# Altium PCB Zigbee_GW.PcbDoc (part 1 of 2)
Units mm, origin at the board's own origin, x right, y up, seen from the top; angles counter-clockwise.
Board outline 80.85 x 47.5 mm, 2 copper layers (Top Layer, Bottom Layer), stack 1.569 mm thick; 135 components, 110 nets, 481 pads, 279 vias.
Unrouted connection lines stored in the file: 2.
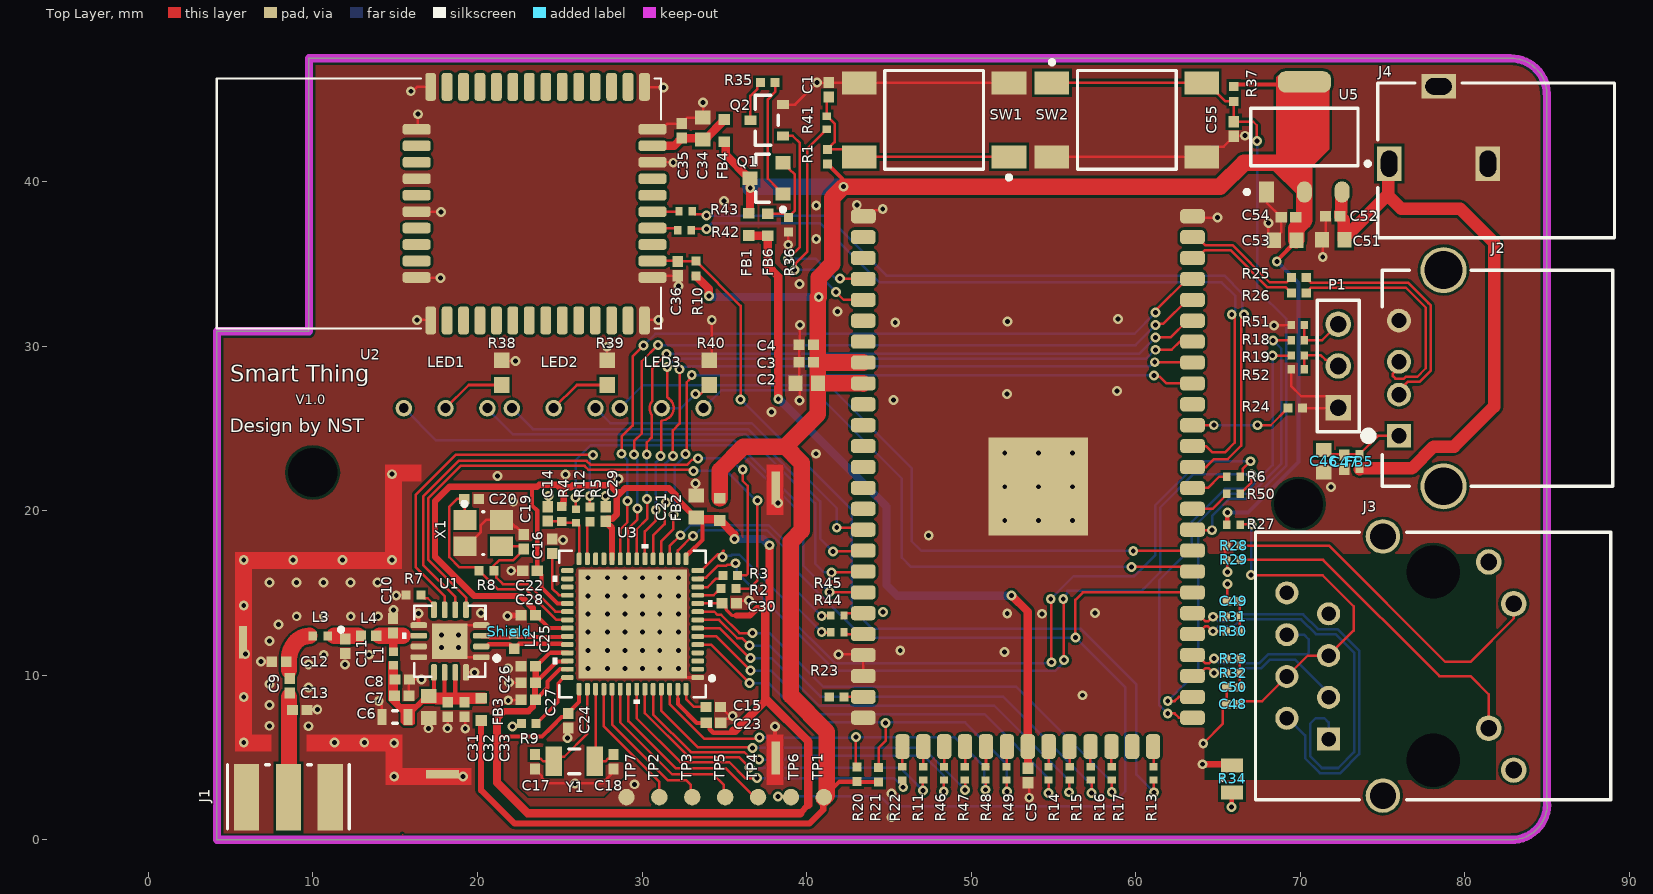
[diagram p0: Top Layer view]
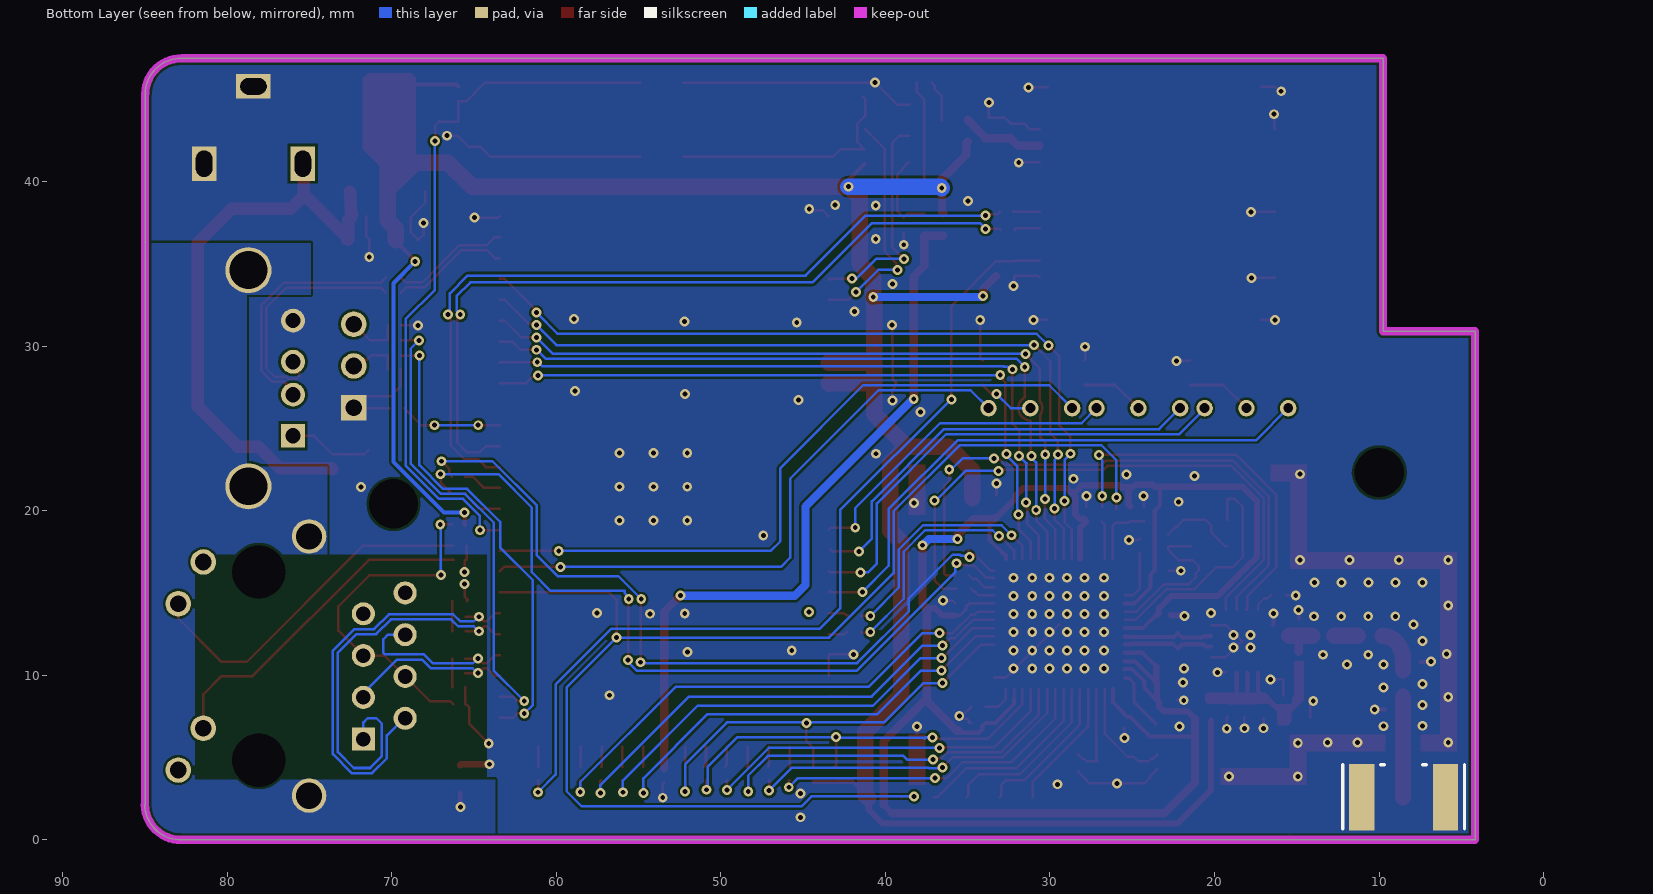
[diagram p1: Bottom Layer view, seen from below]

## Layer stack, top to bottom
Top Solder: solder mask 0.0254, SM-001, Dk 4
Top Layer: signal copper 0.035
Dielectric 1: core 1.4986, Core-043, Dk 4.3
Bottom Layer: signal copper 0.035
Bottom Solder: solder mask 0.0254, SM-001, Dk 4

## Board outline
4.166,0 4.166,30.912 9.754,30.912 9.754,47.498 82.779,47.498 cw(c82.817,45.326) 84.988,45.364 85,45.364 85,2.134 85.014,2.134 cw(c82.842,2.172) 82.804,0

## Design rules (kind name [scope] priority, off if disabled: settings)
Clearance Clearance_INPAD [All] p1: gap=0.152 ignorepadtopadclearanceinfootprint=FALSE
Clearance [All] p2: gap=0.152 ignorepadtopadclearanceinfootprint=FALSE
DiffPairsRouting [All] p1: maxlimit=0.254 minlimit=0.152 mostfreqgap=0.254 toplayer_minwidth=0.152 toplayer_maxwidth=0.381 toplayer_prefwidth=0.381 bottomlayer_minwidth=0.152 bottomlayer_maxwidth=0.381 bottomlayer_prefwidth=0.381 maxuncoupledlength=12.7
MatchedLengths "Schematic Matched Net Lengths_2" [InNetClass('ZIGBEE_RF')] p1: tolerance=0.254 checknetsindiffpair=TRUE checkdiffpairvsdiffpair=FALSE checkxsignals=FALSE checkothers=FALSE
MatchedLengths "Schematic Matched Net Lengths_1" [InNetClass('USB')] p2: tolerance=0.254 checknetsindiffpair=TRUE checkdiffpairvsdiffpair=FALSE checkxsignals=FALSE checkothers=FALSE
MatchedLengths "Schematic Matched Net Lengths" [InNetClass('ETHERNET')] p3: tolerance=0.254 checknetsindiffpair=TRUE checkdiffpairvsdiffpair=FALSE checkxsignals=FALSE checkothers=FALSE
PlaneConnect [All] p1: planeconnectstyle=Direct reliefexpansion=0.508 reliefentries=4 reliefconductorwidth=0.254 reliefairgap=0.254
PolygonConnect [All] p1: connectstyle=Direct reliefconductorwidth=0.254 reliefentries=4 polygonreliefangle="90 Angle" airgapwidth=0.254
RoomDefinition "07. POWER" [InComponentClass('07. POWER')] p1: confinementstyle=ConfineOut formatcopy=TRUE lockcomponents=FALSE outline 87.097,9.22 118.237,9.22 118.237,19.228 87.097,19.228
RoomDefinition "06. ETHERNET" [InComponentClass('06. ETHERNET')] p2: confinementstyle=ConfineOut formatcopy=TRUE lockcomponents=FALSE outline 87.097,20.93 169.316,20.93 169.316,45.593 87.097,45.593
RoomDefinition "04. Z-WAVE" [InComponentClass('04. Z-WAVE')] p3: confinementstyle=ConfineOut formatcopy=TRUE lockcomponents=FALSE outline 149.454,2.159 196.317,2.159 196.317,33.655 149.454,33.655
RoomDefinition "03. ZIGBEE" [InComponentClass('03. ZIGBEE')] p4: confinementstyle=ConfineOut formatcopy=TRUE lockcomponents=FALSE outline 171.933,36.043 206.375,36.043 206.375,57.328 171.933,57.328
RoomDefinition "02. CPU" [InComponentClass('02. CPU')] p5: confinementstyle=ConfineOut formatcopy=TRUE lockcomponents=FALSE outline 103.022,67.132 163.474,67.132 163.474,102.946 103.022,102.946
RoutingVias [All] p1: holewidth=0.3 width=0.6 viastyle="Through Hole" minholewidth=0.3 minwidth=0.6 maxholewidth=0.6 maxwidth=0.9
SolderMaskExpansion [All] p1: expansion=0.102 istentingtop=FALSE
Width [All] p1: maxlimit=1.524 minlimit=0.152 preferedwidth=0.152
28 further rules are at their usual default settings.

## Classes and differential pairs
net class ZIGBEE_RF: RF_N RF_P
net class USB: GND USBL_N USBL_P USBR_N USBR_P
net class ETHERNET: ETH_RX_N ETH_RX_P ETH_TX_N ETH_TX_P
component class "07. POWER": C51 C52 C53 C54 J4 U5
component class "06. ETHERNET": C48 C49 C50 J3 R27 R28 R29 R30 R31 R32 R33 R34
component class "04. Z-WAVE": C34 C35 C36 FB4 R10 U3
component class "03. ZIGBEE": C6 C7 C8 C9 C10 C11 C12 C13 C14 C15 C16 C17 C18 C19 C20 C21 C22 C23 C24 C25 C26 C27 C28 C29 C30 C31 C32 C33 FB2 FB3 J1 L1 L2 L3 L4 R2 R3 R4 R5 R7 R8 R9 R12 Shield TP1 TP2 TP3 TP4 TP5 TP6 TP7 U1 U2 X1 Y1
component class "02. CPU": C1 C2 C3 C4 C5 C46 C47 C55 FB1 FB5 FB6 J2 LED1 LED2 LED3 P1 Q1 Q2 R1 R6 R11 R13 R14 R15 R16 R17 R18 R19 R20 R21 R22 R23 R24 R25 R26 R35 R36 R37 R38 R39 R40 R41 R42 R43 R44 R45 R46 R47 R48 R49 R50 SW1 SW2
differential pair RF: +RF_P -RF_N
differential pair USBR: +USBR_P -USBR_N
differential pair USBL: +USBL_P -USBL_N
differential pair ETH_TX: +ETH_TX_P -ETH_TX_N
differential pair ETH_RX: +ETH_RX_P -ETH_RX_N

## Components (designator, comment, footprint, x,y, rotation, side; value= is the part's Value field where it differs from the comment)
C1 "100nF" CAPC1005X56X25NL10T15 41.351,45.593 r270 top
C2 "2.2uF" CAPC1608X90X35NL10T15 40.005,27.762 r0 top
C3 "100nF" CAPC1005X56X25NL10T15 39.98,29.032 r0 top
C4 "100nF" CAPC1005X56X25NL10T15 39.98,30.099 r0 top
C5 "100nF" CAPC1005X56X25NL10T15 53.458,3.91 r90 top
C6 "1uF" CAPC1608X90X20NL10 14.986,7.468 r0 top
C7 "1nF" CAPC1005X55X25NL05T10 15.392,8.763 r180 top
C8 "12pF" CAPC1005X55X25NL05T10 15.418,9.754 r180 top
C9 "18pF" CAPC1005X55X25NL05T10 8.585,9.373 r270 top
C10 "2.2pF" CAPC1005X55X25NL05T10 14.859,13.005 r270 top
C11 "2.2pF" CAPC1005X55X25NL05T10 11.963,11.76 r90 top
C12 "0.2pF" CAPC1005X55X25NL05T10 7.934,10.82 r0 top
C13 "DNI" CAPC1005X55X25NL05T10 9.195,7.899 r180 top
C14 "100nF" CAPC1005X56X25NL10T15 24.257,19.812 r270 top
C15 "1uF/10V" CAPC1005X55X25NL05T10 34.333,8.077 r180 top
C16 "1uF/10V" CAPC1005X55X25NL05T10 24.536,17.856 r270 top
C17 "9pF" CAPC1005X55X25NL05T10 23.495,4.75 r90 top
C18 "9pF" CAPC1005X55X25NL05T10 28.27,4.75 r90 top
C19 "9pF" CAPC1005X55X25NL05T10 22.809,18.11 r270 top
C20 "9pF" CAPC1005X55X25NL05T10 19.634,20.726 r180 top
C21 "2.2uF" CAPC1608X90X35NL10T15 33.299,20.269 r270 top
C22 "100nF" CAPC1005X56X25NL10T15 23.19,16.358 r0 top
C23 "100nF" CAPC1005X56X25NL10T15 34.343,7.112 r180 top
C24 "100nF" CAPC1005X56X25NL10T15 25.502,7.239 r90 top
C25 "100nF" CAPC1005X56X25NL10T15 23.077,10.541 r0 top
C26 "100nF" CAPC1005X56X25NL10T15 23.077,9.55 r0 top
C27 "100nF" CAPC1005X56X25NL10T15 23.077,8.509 r0 top
C28 "100nF" CAPC1005X56X25NL10T15 23.077,13.665 r0 top
C29 "100nF" CAPC1005X56X25NL10T15 27.788,19.804 r270 top
C30 "100nF" CAPC1005X56X25NL10T15 35.306,14.376 r180 top
C31 "2.2uF" CAPC1608X90X35NL10T15 17.043,8.077 r90 top
C32 "1nF" CAPC1005X55X25NL05T10 18.186,7.925 r90 top
C33 "12pF" CAPC1005X55X25NL05T10 19.202,7.925 r90 top
C34 "2.2uF" CAPC1608X90X35NL10T15 33.68,43.231 r270 top
C35 "1nF" CAPC1005X55X25NL05T10 32.41,43.104 r270 top
C36 "100nF" CAPC1005X56X25NL10T15 32.182,34.722 r90 top
C46 "2.2uF" CAPC1608X90X35NL10T15 71.425,23.012 r90 top
C47 "100nF" CAPC1005X56X25NL10T15 72.669,22.962 r90 top
C48 "22nF" CAPC1005X60X30LL05T10 65.889,8.255 r0 top
C49 "100nF" CAPC1005X60X30LL05T10 65.938,14.503 r0 top
C50 "100nF" CAPC1005X60X30LL05T10 65.913,9.271 r0 top
C51 "2.2uF" CAPC1608X90X35NL10T15 72.009,36.474 r0 top
C52 "100nF" CAPC1005X56X25NL10T15 71.984,37.897 r0 top
C53 "2.2uF" CAPC1608X90X35NL10T15 69.088,36.449 r0 top
C54 "100nF" CAPC1005X56X25NL10T15 69.291,37.846 r0 top
C55 "100nF" CAPC1005X56X25NL10T15 65.964,43.205 r90 top
FB1 "BLM18HE152SN1D" MURA-BLM18-RF-H4-CHIP-2_V 36.5,37.403 r270 top
FB2 "BLM18HE152SN1D" MURA-BLM18-RF-H4-CHIP-2_V 34.722,20.091 r270 top
FB3 "BLM18HE152SN1D" MURA-BLM18-RF-H4-CHIP-2_V 20.218,7.925 r90 top
FB4 "BLM18HE152SN1D" MURA-BLM18-RF-H4-CHIP-2_V 35.001,43.104 r270 top
FB5 "BLM15EG121SN1D" MURA-BLM15-CHIP-2_V 73.609,22.987 r90 top
FB6 "BLM18HE152SN1D" MURA-BLM18-RF-H4-CHIP-2_V 37.643,37.389 r270 top
J1 "CONSMA003.031" CON-SMA-EDGE031 8.509,2.591 r270 top
J2 "292303-1" TE-292303-1_V 77.149,28.058 r90 top locked
J3 "J0011D01BNL" "J0011D01BNL 1PORT 100 BASE-TX" 71.767,6.121 r90 top locked
J4 "PJ-102B" CUI-PJ-102B_V 78.41,41.097 r0 top locked
L1 "LQP15MN4N7B02D" INDC1005X45X25LL10T10 14.884,11.024 r90 top
L2 "DNI" INDC1005X45X25NL10T10 22.225,12.09 r90 top
L3 "2nH" MURA-IND0402_V 10.439,12.395 r0 top
L4 "1nH" INDC1005X45X25NL10T10 13.386,12.395 r180 top
LED1 "LED DUAL 3P" "LED 3P 2.54" 20.599,26.238 r180 top locked
LED2 "LED DUAL 3P" "LED 3P 2.54" 27.165,26.238 r180 top locked
LED3 "LED DUAL 3P" "LED 3P 2.54" 33.731,26.238 r180 top locked
P1 "TSW-103-07-F-S" SMTC-TSW-103-07-X-S 72.314,26.264 r90 top
Q1 "MMBT2222ALT1G" ONSC-SOT-23-3-318-08_V 37.567,40.208 r180 top
Q2 "SI2302CDS-T1-E3" FP-S-03946-MFG 37.574,43.739 r180 top
R1 "10k" RESC1005X40X25NL05T05 41.275,41.522 r270 top
R2 "10k" RESC1005X40X25NL05T05 35.255,15.265 r0 top
R3 "10k" RESC1005X40X25NL05T05 35.357,16.078 r0 top
R4 "10k" RESC1005X40X25NL05T05 25.121,19.812 r90 top
R5 "10k" RESC1005X40X25NL05T05 26.848,19.787 r90 top
R6 "22R" RESC1005X40X25LL05T05 65.948,22.073 r0 top
R7 "3.9k 1%" RESC1005X40X25NL05T05 16.104,14.884 r0 top
R8 "1MHz 1%" RESC1005X40X25NL05T05 20.549,16.358 r180 top locked
R9 "56k 1%" RESC1005X40X25NL05T05 23.114,7.061 r0 top
R10 "10k" RESC1005X40X25NL05T05 33.274,34.722 r270 top
R11 "22R" RESC1005X40X25LL05T05 47.087,4.039 r90 top
R12 "22R" RESC1005X40X25LL05T05 25.984,19.685 r270 top
R13 "22R" RESC1005X40X25LL05T05 61.087,4.039 r270 top
R14 "22R" RESC1005X40X25LL05T05 54.712,4.039 r270 top
R15 "22R" RESC1005X40X25LL05T05 55.99,4.039 r270 top
R16 "22R" RESC1005X40X25LL05T05 57.269,4.039 r270 top
R17 "22R" RESC1005X40X25LL05T05 58.547,4.039 r270 top
R18 "22R" RESC1005X40X25LL05T05 69.85,30.37 r0 top
R19 "22R" RESC1005X40X25LL05T05 69.85,29.447 r0 top
R20 "4k7" RESC1005X40X25NL05T05 43.053,3.988 r270 top
R21 "4k7" RESC1005X40X25NL05T05 44.374,3.962 r270 top
R22 "22R" RESC1005X40X25LL05T05 45.822,4.039 r90 top
R23 "DNI" RESC1005X40X25NL05T05 41.827,8.687 r0 top
R24 "10k" RESC1005X40X25NL05T05 69.698,26.238 r180 top
R25 "22R" RESC1005X40X25NL05T05 69.918,34.188 r180 top
R26 "22R" RESC1005X40X25NL05T05 69.918,33.249 r180 top
R27 "DNI" RESC1005X40X25LL05T05 65.948,19.152 r180 top
R28 "470R" RESC1005X40X25LL05T05 65.948,17.882 r0 top
R29 "470R" RESC1005X40X25LL05T05 65.948,17.018 r0 top
R30 "49.9R 1%" RESC1005X40X25LL05T05 65.913,12.675 r180 top
R31 "49.9R 1%" RESC1005X40X25LL05T05 65.913,13.564 r180 top
R32 "49.9R 1%" RESC1005X40X25LL05T05 65.938,10.135 r180 top
R33 "49.9R 1%" RESC1005X40X25LL05T05 65.938,11.024 r180 top
R34 "0R 0805" RESC2013X50X30LL20T20 65.862,3.708 r270 top
R35 "10k" RESC1005X40X25NL05T05 37.643,46.025 r180 top
R36 "10k" RESC1005X40X25NL05T05 38.887,37.389 r270 top
R37 "10k" RESC1005X40X25NL05T05 65.964,45.339 r90 top
R38 "270R" RESC1609X55X30NL15T15 21.463,28.397 r270 top
R39 "270R" RESC1609X55X30NL15T15 27.889,28.397 r270 top
R40 "270R" RESC1609X55X30NL15T15 34.087,28.397 r270 top
R41 "22R" RESC1005X40X25LL05T05 41.224,43.586 r270 top
R42 "22R" RESC1005X40X25LL05T05 32.582,37.059 r180 top
R43 "22R" RESC1005X40X25LL05T05 32.645,38.202 r180 top
R44 "22R" RESC1005X40X25LL05T05 41.877,12.624 r180 top
R45 "22R" RESC1005X40X25LL05T05 41.877,13.64 r180 top
R46 "22R" RESC1005X40X25LL05T05 48.351,4.039 r90 top
R47 "22R" RESC1005X40X25LL05T05 49.616,4.039 r90 top
R48 "22R" RESC1005X40X25LL05T05 50.881,4.039 r90 top
R49 "22R" RESC1005X40X25LL05T05 52.146,4.039 r90 top
R50 "22R" RESC1005X40X25LL05T05 65.948,21.031 r0 top
R51 "3k" RESC1005X40X25LL05T05 69.85,31.293 r0 top
R52 "3k" RESC1005X40X25LL05T05 69.85,28.6 r0 top
Shield "Shield RF" SHIELD 24.384,11.278 r0 top
SW1 "FSM4JSMATR" TECO-FSM4JSMATR_V 47.752,43.764 r270 top
SW2 "FSM4JSMATR" TECO-FSM4JSMATR_V 59.461,43.764 r90 top
TP1 "Test Point" TP#1 40.359,2.6 r90 top
TP2 "Test Point" TP#2 31.052,2.261 r90 top
TP3 "Test Point" TP#2 33.052,2.261 r90 top
TP4 "Test Point" TP#2 37.052,2.261 r90 top
TP5 "Test Point" TP#2 35.052,2.261 r90 top
TP6 "Test Point" TP#2 39.052,2.261 r90 top
TP7 "Test Point" TP#3 28.472,2.261 r90 top
U1 "Part Number: CC2592RGVT" PQFN16_2P16X2P16 18.326,12.078 r180 top locked value=Value
U2 "Part Number: CC2538SF53RTQR" PQFN56_6P7X6P7 29.426,13.119 r180 top locked value=Value
U3 "ZM5304AE-CME3R" XCVR_ZM5304AE-CME3R 31.194,46.279 r180 top
U5 "AMS1117-3.3" FP-AMS1117-IPC_B 70.256,42.723 r90 top
X1 "TSX-3225 24.0000MF15X-AC3" FP-NX3225SA-MFG 20.345,18.644 r0 top
Y1 "ABS07-120-32.768KHZ-T" ABRA-ABS07_A_V 25.883,4.775 r0 top
? "OMEGA2S" OMEGA2S+ 63.445,39.663 r180 top locked

## Footprints (in the part's own frame and the unit in brackets; to place one, negate y for a bottom-side part, rotate by r counter-clockwise, add the part's x,y. Pads: shape width x height; smd on the part's side, far side on the other; paste and mask are expansions set on the pad)
ABRA-ABS07_A_V [mm] "SMD, 2-Leads, Body 3.2x1.5mm"
  rect 1x1.8 smd: 1(-1.25,0) 2(1.25,0)
  silkscreen extent -0.35,-0.75 0.35,0.75, body extent -1.6,-0.75 1.6,0.75, height 0.9
CAPC1005X55X25NL05T10 [mm] "Chip Capacitor, 2-Leads, Body 1.00x0.50mm, IPC Medium Density"
  rect 0.66x0.62 smd: 1(-0.44,0) 2(0.44,0)
  body extent -0.53,-0.28 0.53,0.27, height 0.55
CAPC1005X56X25NL10T15 [mm] "Chip Capacitor, 2-Leads, Body 1.00x0.50mm, IPC Medium Density"
  rect 0.68x0.64 smd: 1(-0.44,0) 2(0.44,0)
  body extent -0.55,-0.3 0.55,0.3, height 0.56
CAPC1005X60X30LL05T10 [mm] "Chip Capacitor, 2-Leads, Body 1.00x0.50mm, IPC High Density"
  rect 0.56x0.52 smd: 1(-0.38,0) 2(0.38,0)
  body extent -0.53,-0.28 0.53,0.28, height 0.6
CAPC1608X90X20NL10 [mm] "Chip Capacitor, 2-Leads, Body 1.70x0.90mm, IPC Medium Density"
  rect 0.55x0.95 smd: 1(-0.8,0) 2(0.8,0)
  silkscreen extent -0.15,-0.38 0.15,0.38, body extent -0.85,-0.45 0.85,0.45, height 0.9
CAPC1608X90X35NL10T15 [mm] "Chip Capacitor, 2-Leads, Body 1.60x0.80mm, IPC Medium Density"
  rect 0.85x0.95 smd: 1(-0.675,0) 2(0.675,0)
  body extent -0.85,-0.45 0.85,0.45, height 0.9
CON-SMA-EDGE031 [mil] "Connector, SMA Female Edge Mount for 0.031\" Thick Board, 5-Lead, Body Dia. 7.9mm"
  rect 160x60 smd: 1(0,0) 2(0,-100) 5(0,100)
  rect 160x60 smd far side: 3(0,-100) 4(0,100)
  silkscreen extent -77,-146 76,146, body extent -77,-163 387,163, height 187
CUI-PJ-102B_V [mm] "THD, 3-Leads, Body 14.4x9mm, Height 11mm"
  rect 1.5x2.1 hole 1 slot 1.6 at 90 deg: 1(-3,0) 2(3,0)
  rect 2.1x1.5 hole 1 slot 1.6 at 0 deg: 3(0,4.7)
  silkscreen extent -4.42,-4.5 10.7,4.9, body extent -3.7,-4.5 10.7,4.9, height 11
FP-AMS1117-IPC_B [mm]
  rect 1.304x0.912 smd paste+0 mask+0: 1(-3.345,2.29)
  rrect100% 1.304x0.912 smd paste+0 mask+0: 2(-3.345,0) 3(-3.345,-2.29)
  rrect70% 1.304x3.222 smd paste+0 mask+0: 4(3.345,0)
  silkscreen extent -3.47,-3.25 1.75,3.62, body extent -4.25,-3.5 4.25,3.5, height 0.25
FP-NX3225SA-MFG [mm]
  rect 1.4x1.2 smd paste+0 mask+0: 1(-1.1,0.8) 2(1.1,0.8) 3(1.1,-0.8) 4(-1.1,-0.8)
  silkscreen extent -1.27,-1.3 0.03,1.9, body extent -1.9,-1.5 1.9,1.5, height 0.25
FP-S-03946-MFG [mil]
  rect 29x22 smd paste+0 mask+0: 1(-39,37.5) 2(-39,-37.5) 3(39,0)
  silkscreen extent -28,-60 28,60, body extent -57,-64 57,64, height 10
INDC1005X45X25LL10T10 [mm] "Chip Inductor, 2-Leads, Body 1.1x0.6mm, IPC High Density"
  rect 0.53x0.54 smd: 1(-0.415,0) 2(0.415,0)
  body extent -0.55,-0.3 0.55,0.3, height 0.45
INDC1005X45X25NL10T10 [mm] "Chip Inductor, 2-Leads, Body 1.1x0.6mm, IPC Medium Density"
  rect 0.63x0.64 smd: 1(-0.465,0) 2(0.465,0)
  body extent -0.55,-0.3 0.55,0.3, height 0.45
"J0011D01BNL 1PORT 100 BASE-TX" [mm] "1 Port RJ45 Magjack Connector Through Hole 10/100 Base-TX, AutoMDIX"
  rect 1.4x1.4 hole 0.89: 1(0,0.037)
  round 1.4 hole 0.89: 2(3.81,2.577) 3(1.27,2.577) 4(2.54,0.037) 5(5.08,0.037) 6(6.35,2.577) 7(7.62,0.037) 8(8.89,2.577)
  round 1.55 hole 1.02: 9(-1.88,-11.213) 10(0.66,-9.693) 11(8.23,-11.213) 12(10.77,-9.693)
  round 2.95 hole 3.25 unplated: MH1(-1.27,-6.313) MH2(10.16,-6.313)
  round 2.1 hole 1.6: S1(-3.43,-3.263) S2(12.32,-3.263)
  silkscreen extent -3.69,-17.11 12.57,4.49, body extent -3.68,-17.1 12.55,4.48, height 14.24
"LED 3P 2.54" [mm]
  round 1 hole 0.6: 1(0,0) 2(2.54,0) 3(5.08,0)
  body extent -4.19,-3.05 4.54,2, height 5.2
MURA-BLM15-CHIP-2_V [mm] "Chip Ferrite Bead, 2-Leads, Body 1x0.5mm"
  rect 0.5x0.5 smd: 1(-0.45,0) 2(0.45,0)
  body extent -0.52,-0.28 0.53,0.28, height 0.55
MURA-BLM18-RF-H4-CHIP-2_V [mm] "Chip Ferrite Bead, 2-Leads, Body 1.6x0.8mm, Height 0.95mm, Reflow"
  rect 0.65x0.7 smd: 1(-0.675,0) 2(0.675,0)
  body extent -0.8,-0.4 0.8,0.4, height 0.95
MURA-IND0402_V [mm] "SMT Inductor, 2 Leads, Body 1x0.5 mm"
  rect 0.525x0.55 smd: 1(0.463,0) 2(-0.462,0)
  silkscreen extent 1.14,0.26 1.39,0.51, body extent -0.5,-0.25 0.5,0.25, height 0.55
OMEGA2S+ [mm] "LINUX MODULE"
  rrect50% 1.5x0.86 smd mask+0.102: 1(19.99,1.76) 2(20,3.03) 3(20,4.3) 4(20,5.57) 5(20,6.84) 6(20,8.11) 7(20,9.38) 8(20,10.65) 9(20,11.92) 10(20,13.19) 11(20,14.46) 12(20,15.73) 13(20,17) 14(20,18.27) 15(20,19.54) 16(20,20.81) 17(20,22.08) 18(20,23.35) 19(20,24.62) 20(20,25.89) 21(20,27.16) 22(20,28.43) 23(20,29.7) 24(20,30.97) 25(20,32.24) 39(-0.01,32.24) 40(-0.01,30.97) 41(-0.01,29.7) 42(-0.01,28.43) 43(-0.01,27.16) 44(-0.01,25.89) 45(-0.01,24.62) 46(-0.01,23.35) 47(-0.01,22.08) 48(-0.01,20.81) 49(-0.01,19.54) 50(-0.01,18.27) 51(-0.01,17) 52(-0.01,15.73) 53(-0.01,14.46) 54(-0.01,13.19) 55(-0.01,11.92) 56(-0.01,10.65) 57(-0.01,9.38) 58(-0.01,8.11) 59(-0.01,6.84) 60(-0.01,5.57) 61(-0.01,4.3) 62(-0.01,3.03) 63(-0.01,1.76)
  rrect50% 0.86x1.5 smd mask+0.102: 26(17.62,33.99) 27(16.35,33.99) 28(15.08,33.99) 29(13.81,33.99) 30(12.54,33.99) 31(11.27,33.99) 32(10,33.99) 33(8.73,33.99) 34(7.46,33.99) 35(6.19,33.99) 36(4.92,33.99) 37(3.65,33.99) 38(2.38,33.99)
  rect 6.041x5.959 smd: 64(9.369,18.174)
  body extent -0.09,0.03 20.05,33.96, height 2.5
ONSC-SOT-23-3-318-08_V [mm] "SOT23, 3-Leads, Body 2.92x1.3mm, Pitch 0.95mm"
  rect 0.9x0.8 smd: 1(-1,0.95) 2(-1,-0.95) 3(1,0)
  silkscreen extent -1.13,-1.46 0.65,2.02, body extent -0.65,-1.46 0.65,1.46, height 1.11
PQFN16_2P16X2P16 [mm]
  rrect50% 1x0.35 smd paste-0.175: 1(-1.9,0.975) 2(-1.9,0.325) 3(-1.9,-0.325) 4(-1.9,-0.975) 9(1.9,-0.975) 10(1.9,-0.325) 11(1.9,0.325) 12(1.9,0.975)
  rrect50% 0.35x1 smd paste-0.175: 5(-0.975,-1.905) 6(-0.325,-1.9) 7(0.325,-1.9) 8(0.975,-1.905) 13(0.975,1.9) 14(0.325,1.9) 15(-0.325,1.9) 16(-0.975,1.9)
  rect 2.16x2.16 smd paste-1.067 mask-1.067: 17(0,0)
  silkscreen extent -2.97,-2.15 2.91,2.15, body extent -2.15,-2.1 2.1,2.15, height 1
PQFN56_6P7X6P7 [mm]
  rrect50% 0.754x0.3 smd paste-0.15: 1(-3.961,3.25) 2(-3.961,2.75) 3(-3.961,2.25) 4(-3.961,1.75) 5(-3.961,1.25) 6(-3.961,0.75) 7(-3.961,0.25) 8(-3.961,-0.25) 9(-3.961,-0.75) 10(-3.961,-1.25) 11(-3.961,-1.75) 12(-3.961,-2.25) 13(-3.961,-2.75) 14(-3.961,-3.25) 29(3.961,-3.25) 30(3.961,-2.75) 31(3.961,-2.25) 32(3.961,-1.75) 33(3.961,-1.25) 34(3.961,-0.75) 35(3.961,-0.25) 36(3.961,0.25) 37(3.961,0.75) 38(3.961,1.25) 39(3.961,1.75) 40(3.961,2.25) 41(3.961,2.75) 42(3.961,3.25)
  rrect50% 0.3x0.754 smd paste-0.15: 15(-3.251,-3.961) 16(-2.751,-3.961) 17(-2.251,-3.961) 18(-1.75,-3.961) 19(-1.25,-3.961) 20(-0.75,-3.961) 21(-0.25,-3.961) 22(0.25,-3.961) 23(0.75,-3.961) 24(1.25,-3.961) 25(1.75,-3.961) 26(2.251,-3.961) 27(2.751,-3.961) 28(3.251,-3.961) 43(3.251,3.961) 44(2.751,3.961) 45(2.251,3.961) 46(1.75,3.961) 47(1.25,3.961) 48(0.75,3.961) 49(0.25,3.961) 50(-0.25,3.961) 51(-0.75,3.961) 52(-1.25,3.961) 53(-1.75,3.961) 54(-2.251,3.961) 55(-2.751,3.961) 56(-3.251,3.961)
  rect 6.6x6.6 smd paste-3.287 mask-3.289: 57(0,0)
  silkscreen extent -4.95,-4.85 4.85,4.85, body extent -4.13,-4.13 4.13,4.13, height 0.74
RESC1005X40X25LL05T05 [mm] "Chip Resistor, 2-Leads, Body 1.00x0.50mm, IPC High Density"
  rect 0.45x0.5 smd: 1(-0.4,0) 2(0.4,0)
  body extent -0.53,-0.28 0.53,0.28, height 0.4
RESC1005X40X25NL05T05 [mm] "Chip Resistor, 2-Leads, Body 1.00x0.50mm, IPC Medium Density"
  rect 0.55x0.55 smd: 1(-0.45,0) 2(0.45,0)
  body extent -0.53,-0.27 0.53,0.28, height 0.4
RESC1609X55X30NL15T15 [mm] "Chip Resistor, 2-Leads, Body 1.75x0.95mm, IPC Medium Density"
  rect 0.95x0.95 smd: 1(-0.75,0) 2(0.75,0)
  body extent -0.87,-0.48 0.87,0.48, height 0.55
RESC2013X50X30LL20T20 [mm] "Chip Resistor, 2-Leads, Body 2.00x1.25mm, IPC High Density"
  rect 0.85x1.35 smd: 1(-0.825,0) 2(0.825,0)
  silkscreen extent -0.1,-0.58 0.1,0.58, body extent -1.1,-0.72 1.1,0.72, height 0.5
SHIELD [mm]
  rect 0.5x2 smd: 1(-18.644,0.737) 2(13.741,10.109) 3(13.741,-6.299)
  rect 2x0.5 smd: 4(-6.502,-7.29)
  body extent -19.1,-7.77 14.22,11.68, height 3.5
SMTC-TSW-103-07-X-S [mm] ".025 SQ Post Terminal Strip Assembly, 1x3 Pins, Vertical, 2.54mm Pitch, Male"
  rect 1.55x1.55 hole 1.02: 1(0,0)
  round 1.55 hole 1.02: 2(2.54,0) 3(5.08,0)
  silkscreen extent -1.46,-1.27 6.54,1.27, body extent -1.27,-1.27 6.35,1.27, height 8.38
TE-292303-1_V [mm] "THD, 4-Leads, Body 13.13x14mm, Pitch 2.5mm"
  rect 1.45x1.45 hole 0.92: 1(-3.5,1.144)
  round 1.45 hole 0.92: 2(-1,1.144) 3(1,1.144) 4(3.5,1.144)
  round 2.8 hole 2.3: 5(-6.57,-1.566) 6(6.57,-1.566)
  silkscreen extent -6.57,-11.85 6.57,3.25, body extent -8.12,-11.85 8.12,2.15, height 7.72
TECO-FSM4JSMATR_V [mm] "SMD, 4-Leads, Body 6x6mm, Pitch 4.5mm"
  rect 1.4x2.1 smd: 1(2.25,4.55) 2(2.25,-4.55) 3(-2.25,4.55) 4(-2.25,-4.55)
  silkscreen extent -3,-3 3.62,4.68, body extent -3,-5 3,5, height 5.08
TP#1 [mm]
  round 1 smd: 1(0,-0.693)
TP#2 [mm]
  round 1 smd: 1(0.339,0)
TP#3 [mm]
  round 1 smd: 1(0.339,-0.58)
XCVR_ZM5304AE-CME3R [mm]
  rrect50% 1.7x0.65 smd: 1(0.559,12.095) 2(0.559,11.095) 3(0.559,10.095) 4(0.559,9.095) 5(0.559,8.095) 6(0.559,7.095) 7(0.559,6.095) 8(0.559,5.095) 9(0.559,4.095) 10(0.559,3.095) 25(14.894,3.095) 26(14.894,4.095) 27(14.894,5.095) 28(14.894,6.095) 29(14.894,7.095) 30(14.894,8.095) 31(14.894,9.095) 32(14.894,10.095) 33(14.894,11.095) 34(14.894,12.095)
  rrect50% 0.65x1.7 smd: 11(1.045,0.508) 12(2.045,0.508) 13(3.045,0.508) 14(4.045,0.508) 15(5.045,0.508) 16(6.045,0.508) 17(7.045,0.508) 18(8.045,0.508) 19(9.045,0.508) 20(10.045,0.508) 21(11.045,0.508) 22(12.045,0.508) 23(13.045,0.508) 24(14.045,0.508) 35(14.044,14.707) 36(13.044,14.707) 37(12.044,14.707) 38(11.044,14.707) 39(10.044,14.707) 40(9.044,14.707) 41(8.044,14.707) 42(7.044,14.707) 43(6.044,14.707) 44(5.044,14.707) 45(4.044,14.707) 46(3.044,14.707) 47(2.044,14.707) 48(1.045,14.707)
  silkscreen extent 0.04,-0.01 27.04,15.19, body extent 0,0 27,15.21, height 4.85

## Part data
C1 C3 C4 C5 C14 C22 C23 C24 C25 C26 C27 C28 C29 C30 C36 C47 C52 C54 C55: library part CMP-2008-02743-1, Manufacturer="AVX Interconnect / Elco", Part Number=04026D104KAT2A
C2 C21 C31 C34 C46 C51 C53: library part CMP-2006-02354-1, Manufacturer=Murata, Part Number=GCM188R70J225KE22D
C6: library part CMP-2000-06025-1, "Chip Capacitor, 1 uF, +/- 10%, 50 V, -55 to 85 degC, 0603 (1608 Metric), RoHS, Tape and Reel", Capacitance=1µF, Manufacturer=TDK, Operating Temperature=-55°C~85°C, Package / Case=0603(1608Metric), Package Description="2-Pin Surface Mount Device, Body 1.6 x 0.8 mm", Package Reference=0603, PCN Part Number=MLCCPartNumberChange30/Nov/2012, Ratings=-, Standard Package=1, Temperature Coefficient=X5R, Tolerance=±10%, Voltage - Rated=50V, Applications=GeneralPurpose, Category=Capacitors, Datasheet URL=https://product.tdk.com/info/en/catalog/datasheets/mlcc_commercial_general_en.pdf, Datasheet Version=08/2016, Design Resources=20WNon-IsolatedBuckLEDDriverUsingPLLNK460KG, Family=CeramicCapacitors, Features=-, Height - Seated (Max)=-, Lead Spacing=-, Lead Style=-, Manufacturer URL=http://www.tdk.com/, Mounting Technology=SurfaceMount, Mounting Type=SurfaceMount,MLCC, Online Catalog=CSeries,GeneralPurpose, Other Names=445-7468-6, Packaging=Digi-Reel®, Product Training Modules=CSeriesGeneralApplicationsSEAT,CCV,andTVCLDesignToolsGuidetoReplacinganElectrolyticCapacitorwithanMLCC, RoHS Information=RoHSCertificate-MLCC, Series=C, Size / Dimension="0.063\"Lx0.031\"W(1.60mmx0.80mm)", Thickness (Max)="0.035\"(0.90mm)"
C7 C32 C35: library part CMP-2008-04254-1, Manufacturer=Murata, Part Number=GRM1555C1H102JA01D
C8 C33: library part CMP-2008-03945-1, Manufacturer=Murata, Part Number=GRM1555C1H120GA01D
C9 C13: library part CMP-2008-03748-1, Manufacturer=Murata, Part Number=GJM1555C1H180GB01D
C10 C11: library part CMP-2008-03835-1, Manufacturer=Murata, Part Number=GJM1555C1H2R2BB01D
C12: library part CMP-2008-03980-1, Manufacturer=Murata, Part Number=GRM1555C1HR20WA01D
C15 C16: library part CMP-2008-04556-1, Manufacturer=Murata, Part Number=GRM155R61A105KE15D
C17 C18 C19 C20: library part CMP-2008-03890-1, Manufacturer=Murata, Part Number=GJM1555C1H9R0CB01D
C48: library part CMP-2008-04654-1, Manufacturer=Murata, Part Number=GRM155R71H223KA12D
C49 C50: library part CMP-2100-03641-1, "Chip Capacitor, 0.1 uF, +/- 10%, 16 V, -55 to 125 degC, 0402 (1005 Metric), RoHS, Tape and Reel", Case Code (Imperial)=0402, Case Code (Metric)=1005, Dielectric=X7R, Dielectric Material=Ceramic, Insulation Resistance=10GR, Manufacturer=Murata, Max Operating Temperature=125degC, Min Operating Temperature=-55degC, Package Description="2-Pin Surface Mount Device, Body 1 x 0.5 mm", Package Quantity=1, Tolerance=10%, Voltage=16V, Capacitance=100nF, Case/Package=0402, Datasheet URL=http://psearch.en.murata.com/capacitor/product/GRM155R71C104KA88%23.pdf, Datasheet Version=42675.0, Depth=0.5mm, Height=0.5mm, Lead Free=LeadFree, Length=1mm, Manufacturer URL=http://www.murata.com/, Material=Ceramic, Mount=SurfaceMount, Number of Pins=2, Package Reference=0402, Packaging=TapeandReel, Radiation Hardening=No, REACH SVHC=NoSVHC, RoHSCompliant=true, Termination=SMD/SMT, Thickness=0.022inch, Voltage Rating=16V, Voltage Rating (DC)=16V, Width=0.5mm
FB1 FB2 FB3 FB4 FB6: library part CMP-0686-00368-2, "Chip Ferrite Bead for GHz Band High-speed Signal Lines, 1500 Ohm, 500 mA, -55 to 125 degC, 1.6 x 0.8 x 0.95 mm SMD, Tape and Reel", DC Resistance="0.50 Ohm Max.", Manufacturer=Murata, Operating Temperature Range="-55 to 125 degC", Rated Current="500 mA", ComponentLink1Description="Manufacturer URL", ComponentLink1URL=http://www.murata.com/, ComponentLink2Description=Datasheet, ComponentLink2URL=http://www.murata.com/products/catalog/pdf/c31e.pdf, ComponentLink3Description="Package Specification", ComponentLink3URL=http://www.murata.com/products/catalog/pdf/c31e.pdf, DatasheetVersion=08/2013, Impedance (at 100 MHz)="1500 Ohm +/- 25%", Mounting Technology="Surface Mount", PackageDescription="2-Pin Chip, Body 1.6 x 0.8 mm", PackageReference=BLM18_H950-2, Packing="Tape and Reel", PartNumber=BLM18HE152SN1D
FB5: library part CMP-0686-00148-3, "Chip Ferrite Bead for GHz Band General Use (Low DC Resistance Type), 120 Ohm, 1500 mA, -55 to 125 degC, 1 x 0.5 x 0.55 mm SMD, Tape and Reel", DC Resistance="0.095 Ohm Max.", Manufacturer=Murata, Operating Temperature Range="-55 to 125 degC", Rated Current="1500 mA", ComponentLink1Description="Manufacturer URL", ComponentLink1URL=http://www.murata.com/, ComponentLink2Description=Datasheet, ComponentLink2URL=http://www.murata.com/products/catalog/pdf/c31e.pdf, ComponentLink3Description="Package Specification", ComponentLink3URL=http://www.murata.com/products/catalog/pdf/c31e.pdf, DatasheetVersion=08/2013, Impedance (at 100 MHz)="120 Ohm +/- 25%", Mounting Technology="Surface Mount", PackageDescription="2-Pin Chip, Body 1 x 0.5 mm", PackageReference=BLM15-2, Packing="Tape and Reel", PartNumber=BLM15EG121SN1D
J1: library part CMP-0168-00026-1, "SMA Female Edge Mount Connector for 0.031\" Thick Board", DatasheetVersion="rev1.0, Jul-2006", PackageDescription="SMA Female Edge Mount Connector for 0.031\" Thick Board, 7.9 mm Body Dia.", PackageReference=CON-SMA-EDGE031, PackageVersion="rev1.0, Jul-2006", PCB_Layout="Pads complies with manufacturer's recommendation."
J2: library part CMP-2000-05404-1, "1 Port Right Angle Through Hole Mount Female Type A USB Connector, 4 Position, -55 to 85 degC, RoHS, Tube", Manufacturer="TE Connectivity", Package Description="4-Pin Through Hole Device, Body 14 x 13.13 mm, Pitch 2.5 mm", Connector Mounting=PCB, Connector Type=USBA, Contact Material=Copper, Contact Plating=Gold, Contact Termination Type=Solder, Datasheet URL=http://www.farnell.com/cad/1653030.pdf, Datasheet Version=Feb-12, Gender=Receptacle, Manufacturer URL=http://www.te.com/, No. of Contacts=4, Package Reference=292303-1, SVHC=NoSVHC(16-Jun-2014)
J3: library part CMP-2000-06492-1, "RJ45 Connector, Pitch 1.27 mm, 12 Position, Height 13.84 mm, Tail Length 3.3 mm, 0 to 70 degC, RoHS, Tray", LED Color=Green-Yellow, Manufacturer="Pulse Electronics", Operating Temperature=0°C~70°C, Package Description="RJ45 Connector, Pitch 1.27 mm, 12 Position, Height 13.84 mm, Tail Length 3.3 mm", Package Reference=J0-A, Standard Package=30, Applications=10/100Base-TX,AutoMDIX, Catalog Drawings=PULSEJACKRightAngle1x1, Category=Connectors,Interconnects, Connector Type=RJ45, Contact Finish=Gold, Contact Finish Thickness=15µin(0.38µm), Contact Material=PhosphorBronze, Datasheet URL=http://productfinder.pulseeng.com/products/datasheets/J403.pdf, Datasheet Version="Rev. K, 08/2012", Dynamic Catalog=PULSEJACK™J0andJ2Series, Family=ModularConnectors-JacksWithMagnetics, Features=BoardGuide, Height Above Board="0.545\"(13.84mm)", Housing Material=Thermoplastic, Manufacturer URL=http://www.pulseelectronics.com/, Mounting Technology=ThroughHole, Mounting Type=ThroughHole, Number of Cores per Jack=4, Number of Ports=1, Number of Rows=1, Orientation=90°Angle(Right), Other Names="553-1483 / J0011D01BNL-ND", Packaging=Tray, Series=PULSEJACK™J0, Shield Material=Brass, Shielding=Shielded, Tab Direction=Down, Termination=Solder
J4: library part CMP-2000-06900-1, "Through Hole Right Angle DC Power Jack, 2.5 A, 2.5 mm Center Pin, 3 Position, -25 to 85 degC, RoHS, Bulk", Current Rating=2.5A, Flammability Rating=UL94V-0, Insulation Resistance=100MOhms, Manufacturer=CUIInc., Operating Temperature Range=-25Cto+85C, Package Description="3-Pin Through Hole Device, Body 14.4 x 9 mm, Height 11 mm", Voltage Rating=24V, Brand=CUI, Connector Type=DCPowerJack, Contact Gender=Male, Contact Material=Copper, Contact Plating=Nickel, Datasheet URL=http://www.cui.com/product/resource/pj-102b.pdf, Datasheet Version="Rev. 1.03, 04/2016", Factory Pack Quantity=280, Housing Material=PolybutyleneTerephthalate(PBT), Inside Contact Diameter=2.5mm, Manufacturer URL=http://www.cui.com/, Mounting Angle=Right, Mounting Style=ThroughHole, Mounting Technology=ThroughHole, Outside Contact Diameter=6.5mm, Package Reference=PJ-102B, Packaging=Bulk, Product=Jacks, Product Category=DCPowerConnectors, RoHS=True, Termination Style=ThroughHole
L1: library part CMP-2000-06592-1, "Chip Inductor, 4.7 nH, +/- 0.1 nH, 160 mA, -40 to 85 degC, 0402 (1005 Metric), RoHS, Tape and Reel", Inductance=4.7nH, Manufacturer=Murata, Maximum DC Current=160mA, Maximum DC Resistance=600mOhm, Package Description="2-Pin Surface Mount Device, Body 1 x 0.5 mm", Package Reference=0402, Tolerance=0.1nH, Datasheet URL=http://search.murata.co.jp/Ceramy/image/img/PDF/ENG/L0075S0084LQP15M.pdf, Datasheet Version=09/2010, Manufacturer URL=http://www.murata.com/, Minimum Quality Factor=13@500MHz, Mounting Technology=SurfaceMount, Package/Case=0402, Packaging=Tape&Reel, Product Depth=0.6mm, Product Height=0.45mm, Rad Hard=No, Type=RFChip
L2: library part CMP-2000-06590-1, "Chip Inductor, 1.8 nH, +/- 0.1 nH, 280 mA, -40 to 85 degC, 0402 (1005 Metric), RoHS, Tape and Reel", Case Size/Dimension=0402, DC Resistance=0.2O, Inductance-Nom=1.8nH, Manufacturer=Murata, Package Description="2-Pin Surface Mount Device, Body 1 x 0.5 mm", Rated Current-Max=280mA, Tolerance (nH)=±0.1nH, Datasheet URL=http://search.murata.co.jp/Ceramy/image/img/PDF/ENG/L0075S0084LQP15M.pdf, Datasheet Version=09/2010, Manufacturer URL=http://www.murata.com/, Mounting Technology=SurfaceMount, Package Reference=0402
L3: library part CMP-0499-00001-3, "Chip Inductor (Chip Coil) for High Frequency Multilayer, 2 +/- 0.3 nH, 300 mA, 0402 (1005), 180mm Paper Tape", Inductance="2.0 nH +/- 0.3 nH", Inductance Test Frequency="100 MHz", Manufacturer=Murata, Max. Of DC Resistance="0.1 ohm", Operating Temperature Range="-55 to 125 degC", PartNumber=LQG15HS2N0S02D, Rated Current (Itemp) (Based on Temperature rise)="300 mA", Self Resonance Frequency (min.)="6000 MHz", ComponentLink1Description="Manufacturer URL", ComponentLink1URL=http://www.murata.com/, ComponentLink2Description=Datasheet, ComponentLink2URL=http://search.murata.co.jp/Ceramy/image/img/PDF/ENG/L0075S0083LQG15HS.pdf, ComponentLink3Description="Package Specification", ComponentLink3URL=http://search.murata.co.jp/Ceramy/image/img/PDF/ENG/L0075S0083LQG15HS.pdf, Mounting Technology="Surface Mount", PackageDescription="2-Pin SMT Inductor, 1 x 0.5 mm Body", PackageReference=IND0402, Q (min.)=8, Q Test Frequency="100 MHz", RoHS=Yes
L4: library part CMP-1662-00009-1, "Chip Inductor, 1 nH, +/- 0.1 nH, 400 mA, -40 to 85 degC, 0402 (1005 Metric), RoHS, Tape and Reel", Case/Package=0402, Max Operating Temperature="85 degC", Min Operating Temperature="-40 degC", Package Quantity=10000, PartNumber=LQP15MN1N0B02D, ComponentLink1Description="Manufacturer URL", ComponentLink1URL=http://www.murata.com/, ComponentLink2Description=Datasheet, ComponentLink2URL=https://www.modelithics.com/models/Vendor/MuRata/LQP15M.pdf, DatasheetVersion=09/2010, Height="0.35 mm", Length="1 mm", Mount="Surface Mount", Mounting Technology="Surface Mount", PackageDescription="2-Pin Surface Mount Device, Body 1 x 0.5 mm", Packaging="Tape and Reel", Radiation Hardening=No, RoHSCompliant=True, Width="0.5 mm"
P1: library part CMP-1024-00331-1, "0.025\" SQ Post Header, Through-hole, Vertical, -55 to 125 degC, 2.54 mm Pitch, 3-Pin, Male, RoHS", Manufacturer=Samtec, Temperature Range="-55 to 125 degC", ComponentLink1Description="Manufacturer URL", ComponentLink1URL=http://www.samtec.com, ComponentLink2Description=Datasheet, ComponentLink2URL=http://www.samtec.com/documents/webfiles/pdf/TSW_TH.PDF, ComponentLink3Description="Package Specification", ComponentLink3URL=http://www.samtec.com/documents/webfiles/cpdf/TSW-XXX-XX-XXX-X-XX-XXX-MKT.pdf, DatasheetVersion=F-214, Mounting Technology=Through-hole, Orientation=Vertical, PackageDescription=".025[0.64] SQ. Post Terminal Strip Assembly", PackageReference=TSW-103-07-X-S, PackageVersion="DM, 8/1988", PartNumber=TSW-103-07-F-S, Pitch="2.54 mm", RoHS=True
Q1: library part CMP-1048-00538-1, "General Purpose Transistor, NPN Silicon, 3-Pin SOT-23, Pb-Free, Tape and Reel", Manufacturer="On Semiconductor", ComponentLink1Description="Manufacturer URL", ComponentLink1URL=http://www.onsemi.com/, ComponentLink2Description=Datasheet, ComponentLink2URL=http://www.onsemi.cn/pub_link/Collateral/MMBT2222LT1-D.PDF, ComponentLink3Description="Package Specification", ComponentLink3URL=http://www.onsemi.cn/pub_link/Collateral/318-08.PDF, DatasheetVersion="Rev. 10", fT Min (MHz)=300, IC Continuous (A)=0.6, Mounting Technology="Surface Mount", PackageDescription="3-Pin Small Outline Transistor, Body 2.92 x 1.3 mm, Pitch 0.95 mm", PackageReference=SOT-23-3-318-08, PackageVersion="Rev. AP, 11/2009", Packing="Tape and Reel", PartNumber=MMBT2222ALT1G, Polarity=NPN, RoHS=TRUE
Q2: library part CMP-02550-000184-1, "MOSFET N-CH 20V 2.6A SOT-23", Continuous Drain Current=2.6A, Drain To Source Breakdown Voltage=20V, Drain To Source Resistance=0.045Ω, Gate To Source Voltage=8V, Manufacturer=Vishay, Max Forward Diode Voltage=1.2V, Max Junction Temp=+150°C, Package=S-03946, Power Dissipation=0.71W, Pulse Drain Current=10A, Temperature="-55°C to +150°C", Temperature Range Low=-55°C, Typ Forward Diode Voltage=0.7V, Automotive=No, Category=Trans, ComponentLink2Description=Datasheet, ComponentLink2URL=http://www.vishay.com/docs/68645/si2302cds.pdf, Depletion Mode=False, Device Class L1="Discrete Semiconductors", Device Class L2=Transistors, Device Class L3=MOSFETs, Digikey Description="MOSFET N-CH 20V 2.6A SOT-23", Drain To Source Voltage=20V, Gate Charge At Vgs="3.5nC @ 4.5V", Height=1.12mm, Lead Free=Yes, Manufacturer Part Number=SI2302CDS-T1-E3, Mouser Description="MOSFET 20V 2.9A 0.86W 57mohm @ 4.5V", Number Of Channels=1, Number Of N Channels=1, Octopart=https://octopart.com/si2302cds-t1-e3-vishay-44452855, Reverse Recovery Charge=2nC, Reverse Recovery Time=8.5ns, RoHS=TRUE, Rthja Max=140°C/W, Standoff Height=0.01mm, Temperature Range High=+150°C, Threshold Vgs Max=0.85V, Threshold Vgs Min=0.4V, Transconductance=13S, Turn Off Delay Time=30ns, Turn On Delay Time=8ns
R1 R2 R3 R4 R5 R10 R20 R21 R23 R24 R25 R26 R35 R36 R37: library part CMP-2002-08135-1, Manufacturer="Vishay Dale", Part Number=CRCW040210K0FKED
R6 R11 R12 R13 R14 R15 R16 R17 R18 R19 R22 R41 R42 R43 R44 R45 R46 R47 R48 R49 R50 R51 R52: library part CMP-1665-00027-3, "Chip Resistor, 22 Ohm, +/- 1%, 0.1 W, -55 to 155 degC, 0402 (1005 Metric), RoHS, Tape and Reel", Case Code (Imperial)=0402, Case Code (Metric)=1005, Max Operating Temperature="155 degC", Min Operating Temperature="-55 degC", Package Quantity=10000, PartNumber=ERJ-2RKF22R0X, Power Rating="100 mW", Resistance="22 Ohm", Tolerance=1%, Voltage Rating="50 V", Case\/Package=0402, ComponentLink1Description="Manufacturer URL", ComponentLink1URL=http://www.panasonic.com/, ComponentLink2Description=Datasheet, ComponentLink2URL=http://industrial.panasonic.com/cdbs/www-data/pdf/RDA0000/AOA0000C86.pdf, DatasheetVersion=04/2015, Height="0.35 mm", Length="1 mm", Mount="Surface Mount", Mounting Technology="Surface Mount", PackageDescription="2-Pin Surface Mount Device, Body 1 x 0.5 mm", PackageReference=0402, Packaging="Tape and Reel", Pins=2, REACH SVHC=Yes, RoHSCompliant=true, Weight=2.8E-05oz, Width="0.5 mm"
R7: library part CMP-2002-08592-1, Manufacturer="Vishay Dale", Part Number=CRCW04023K90FKED
R8: library part CMP-2002-08122-1, Manufacturer="Vishay Dale", Part Number=CRCW04020000Z0ED
R9: library part CMP-2002-00101-1, Manufacturer="Vishay Dale", Part Number=CRCW040256K0FKED
R27: library part CMP-2002-03046-1, Manufacturer="Vishay Dale", Part Number=CRCW040210R0FKEDHP
R28 R29: library part CMP-2000-03373-1, Manufacturer="Vishay Dale", Part Number=CRCW0603470RFKEA
R30 R31 R32 R33: library part CMP-2002-00969-1, "Precision Thick Film Chip Resistors", Manufacturer=Panasonic, Part Number=ERJ-2RKF49R9X
R34: library part CMP-2001-04896-1, Manufacturer="Vishay Dale", Part Number=CRCW08050000Z0EA
R38 R39 R40: library part CMP-2000-07452-1, "Chip Resistor, 10 KOhm, +/- 1%, 0.1 W, -55 to 155 degC, 0603 (1608 Metric), RoHS, Tape and Reel", Case Code (Imperial)=0603, Case Code (Metric)=1608, Manufacturer=Panasonic, Max Operating Temperature=155degC, Max Power Dissipation=100mW, Min Operating Temperature=-55degC, Package Description="2-Pin Surface Mount Device, Body 1.6 x 0.85 mm", Package Quantity=1, Package Reference=603, Resistance=10KOhm, Temperature Coefficient=100ppm\/degreesC, Tolerance=1%, Voltage Rating=75V, Case\/Package=0603, Composition=ThickFilm, Contact Plating=Tin, Datasheet URL=https://industrial.panasonic.com/cdbs/www-data/pdf/RDA0000/AOA0000C304.pdf, Datasheet Version=02/2017, Depth=0.8mm, Height=0.45mm, Lead Free=LeadFree, Length=1.6mm, Manufacturer URL=http://www.panasonic.com/, Military Standard=Not, Mount=SurfaceMount, Mounting Technology=SurfaceMount, Number of Pins=2, Number of Terminations=2, Packaging=TapeandReel, Power Rating=100mW, Radiation Hardening=No, REACH SVHC=NoSVHC, RoHSCompliant=true, Termination=SMD/SMT, Voltage Rating (DC)=75V, Width=0.031inch
SW1 SW2: library part CMP-2000-07486-1, "Micro Miniature Push Button Switch FSM JSM, 50 mA, -35 to 85 degC, 4-Pin SMD, RoHS, Tape and Reel", Capacitance=0f, Case\/Package=SMD/SMT, Contact Current Rating=50mA, Contact Resistance=100mOhm, Manufacturer="TE Connectivity", Max Operating Temperature=85degC, Max Voltage Rating (DC)=12V, Min Operating Temperature=-35degC, Operating Force=160gf, Package Description="4-Pin Surface Mount Device, Body 6 x 6 mm, Pitch 4.5 mm", Package Quantity=1200, Voltage Rating (DC)=24V, Actuator Length=0.055inch, Actuator Material=Polyamide, Contact Material=CopperAlloy, Contact Plating=Silver, Current Rating=50mA, Datasheet URL=http://www.te.com/commerce/DocumentDelivery/DDEController?Action=showdoc&DocId=Customer+Drawing%7F2-1437565-7%7FV%7Fpdf%7FEnglish%7FENG_CD_2-1437565-7_V.pdf%7F4-1437565-2, Datasheet Version="Rev. V, 02/2015", Electrical Life=100000Cycles, Illumination Type=Illuminated, Manufacturer URL=http://www.te.com/, Mechanical Life=100000Cycles, Mount=SurfaceMount, Mounting Technology=SurfaceMount, Orientation=Straight, Package Reference=FSM4JSMATR, Packaging=TapeandReel, REACH SVHC=Unknown, RoHSCompliant=true, Switch Travel=0.25mm, Termination=GullWing, Throw Configuration=SPST
TP1 TP2 TP3 TP4 TP5 TP6 TP7: library part TP
U1: library part CC2592RGVT, "No Description Available", Built_By=EMA_UL_Team, Copyright="Copyright (C) 2018 Accelerated Designs. All rights reserved", Manufacturer_Part_Number=CC2592RGVT, RefDes=RefDes, Type=DEV, Vendor="Texas Instruments"
U2: library part CC2538SF53RTQR, "IC RF TxRx + MCU 802.15.4 6LoWPAN, Zigbee® 2.4GHz 56-VFQFN Exposed Pad", Built_By=EMA_UL_Team, Copyright="Copyright (C) 2018 Accelerated Designs. All rights reserved", Manufacturer_Part_Number=CC2538SF53RTQR, RefDes=RefDes, Type=DEV, Vendor="Texas Instruments"
U3: "General ISM < 1GHz Z-WaveÂ® Transceiver Module 868MHz Surface Mount", Package="Module Sigma Designs", Digi-Key_Part_Number=703-1074-1-ND, Digi-Key_Purchase_URL=https://www.digikey.com/product-detail/en/silicon-labs/ZM5304AE-CME3R/703-1074-1-ND/4135431?utm_source=snapeda&utm_medium=aggregator&utm_campaign=symbol, MF="Silicon Labs", MP=ZM5304AE-CME3R, SnapEDA_Link=https://www.snapeda.com/parts/ZM5304AE-CME3R/Silicon%20Labs/view-part/214706/?ref=snap
U5: library part CMP-209535-000001-1, "LDO Voltage Regulators 1A, 3.3V", Dropout Voltage=1.1V, Manufacturer="Advanced Monolithic Systems", Max Junction Temp=+125°C, Max Power Dissipation=1.2W, Max Supply Voltage=15V, Nominal Supply Current=5mA, Output Current=1A, Output Voltage=3.3V, Package=AMS1117, Temperature="-40°C to +125°C", Temperature Range Low=-40°C, Automotive=No, Category=IC, ComponentLink2Description=Datasheet, ComponentLink2URL=http://www.advanced-monolithic.com/pdf/ds1117.pdf, Device Class L1="Integrated Circuits (ICs)", Device Class L2="Power Management ICs", Device Class L3="Voltage Regulators - Linear", Height=1.8mm, Ipc Land Pattern Name=SOT229P700X180-4, Lead Free=Yes, Manufacturer Part Number=AMS1117-3.3, Number Of Outputs=1, Octopart=https://octopart.com/ams1117-3.3-advanced+monolithic+systems-25899300, Output Type=Fixed, RoHS=TRUE, Standoff Height=0.64mm, Temperature Range High=+125°C
X1: library part CMP-2000-07333-1, "MHz Range Crystal, 24 MHz, -40 to 85 degC, 4-Pin SMD, RoHS, Tape and Reel", Frequency=24MHz, Frequency Stability=10PPM, Load Capacitance=9pF, Manufacturer=Epson, Operating Temperature Range=-40Cto+85C, Package / Case=3.2mmx2.5mm, Package Description="4-Pin Surface Mount Device, Body 3.2 x 2.5 mm", Package Reference=TSX-3225, Brand=EpsonTiming, Datasheet URL=https://support.epson.biz/td/api/doc_check.php?dl=brief_FA-238V_en.pdf, Datasheet Version=12/2015, Drive Level=200uW, Esr=40Ohms, Factory Pack Quantity=250, Height=0.6mm, Length=3.2mm, Manufacturer URL=https://www.eea.epson.com/, Mounting Style=SMD/SMT, Mounting Technology=SurfaceMount, Packaging=Reel, Product Category=Crystals, RoHS=True, Series=TSX-3225, Termination Style=SMD/SMT, Tolerance=10PPM, Type=Crystal, Unit Weight=0.000564oz, Width=2.5mm
Y1: library part CMP-2000-07587-1, "Tuning Fork Crystal, 32.768 KHz, +/- 20 ppm, -40 to 85 degC, 2-Pin SMD, RoHS, Tape and Reel", Case\/Package=SMD/SMT, ESR (Equivalent Series Resistance)=55KOhm, Frequency=32.768KHz, Frequency Tolerance=20ppm, Load Capacitance=6pF, Manufacturer=Abracon, Max Operating Temperature=85degC, Min Operating Temperature=-40degC, Package Description="2-Pin Surface Mount Device, Body 3.2 x 1.5 mm", Package Quantity=3000, Package Reference=ABS07, Series Resistance=60KOhm, Datasheet URL=http://www.abracon.com/Resonators/ABS07-120-32.768kHz-T.pdf, Datasheet Version=11/2014, Depth=1.5mm, Height=0.035inch, Lead Free=LeadFree, Length=3.2mm, Manufacturer URL=http://www.abracon.com/, Mount=SurfaceMount, Mounting Technology=SurfaceMount, Number of Pins=2, Packaging=TapeandReel, Radiation Hardening=No, REACH SVHC=NoSVHC, RoHSCompliant=True, Termination=SMD/SMT, Tolerance=20ppm, Width=0.061inch
?: "MediaTek Transceiver; 802.11 b/g/n _Wi-Fi, WiFi, WLAN_ For Use With MT7688", Package="Module Onion", Availability=Unavailable, MF=Onion, MP=OMEGA2S, Price=None, SnapEDA_Link=https://www.snapeda.com/parts/OMEGA2S/Onion/view-part/3600410/?ref=snap

## Free pads (board coordinates)
  round 1 hole 3: 2(9.982,22.327) 3(69.901,20.422)

## Via types
v1: diameter 0.6, hole 0.3, Top Layer to Bottom Layer, tented both sides, 279 vias

## Nets (pads, with @x,y where several pads share a name; then routed paths per layer and width w, separated by ;. In a path a pad name is that pad's centre, name@x,y a point inside that pad or via, vN(x,y) a via of type N, cw(c..) or ccw(c..) an arc to the next point about the centre after c; other vN are vias at no path point)
+3V3: ?.8 ?.9 C2.2 C3.2 C4.2 C53.2 C54.2 FB1.1 FB2.1 FB3.1 FB4.2 Q1.3 R1.2 R10.2 R20.2 R21.2 R27.2 R37.2 TP1.1 U5.2 U5.4 | length 167.7
  Top Layer w0.254: TP1.1@41.224,2.754 42.008,3.538 R20.2@43.053,3.538 43.066,3.525 44.361,3.525 R21.2@44.374,3.512 ; R1.2@41.275,41.072 42.174,40.173 42.174,39.766 v1(42.24,39.7) ; R27.2@65.548,19.152 65.565,19.169 65.565,19.871 v1(65.583,19.888) ; R37.2@65.964,45.789 66.078,45.903 70.142,45.903 U5.4@70.256,46.018 ; v1(68.58,35.154) 68.58,35.216 69.763,36.399 C53.2@69.763,36.449
  Top Layer w0.33: TP1.1@41.006,2.494 TP1.1@41.052,2.54
  Top Layer w0.381: FB3.1@20.218,7.25 20.218,3.023 22.25,0.991 40.157,0.991 41.006,1.839 TP1.1@41.006,2.494
  Top Layer w0.508: R10.2@33.274,34.272 34.044,33.502 34.044,33.063 v1(34.061,33.045) ; FB4.2@35.001,42.429 35.026,42.429 35.097,42.358 35.097,41.628 36.517,40.208 Q1.3@36.567,40.208 36.533,40.175 v1@36.533,39.624 ; FB1.1@36.475,38.078 36.487,38.078 36.558,38.149 36.558,39.606 v1(36.576,39.624)
  Top Layer w1.016: FB2.1@34.722,20.766 34.722,22.466 36.158,23.901 38.71,23.901 ; C3.2@40.641,28.81 C3.2@40.68,28.81 ; v1@40.68,32.995 40.68,30.099 C3.2@40.68,28.81 ; v1(40.742,32.995) 40.742,34.175 41.554,34.988 41.554,39.014 v1(42.24,39.7) ; TP1.1@41.052,2.54 41.224,2.712 41.224,2.754 41.224,6.579 39.04,8.763 39.04,18.136 39.7,18.796 39.7,22.911 38.71,23.901 ; v1@42.342,39.7 65.126,39.7 66.573,41.148 68.593,41.148 U5.2@70.256,39.484 ; ?.9@43.445,27.743 43.435,27.752 40.69,27.752 C2.2@40.68,27.762 ; ?.8@43.445,29.013 40.882,29.013 C3.2@40.68,28.81 ; C53.2@69.763,36.449 69.763,37.164 70.088,37.489 70.256,37.657 U5.2@70.256,39.484 ; U5.4@70.256,46.018 U5.2@70.256,39.484 ; 38.71,23.901 40.68,25.872 C2.2@40.68,27.762 ; C2.2@40.68,27.762 C3.2@40.68,28.81
  Bottom Layer w0.254: v1(65.583,19.888) 66.827,19.888 69.901,22.962 69.901,33.833 v1(68.58,35.154)
  Bottom Layer w0.508: v1(34.061,33.045) 34.086,33.045 34.137,32.995 v1(40.742,32.995)
  Bottom Layer w1.016: v1(36.576,39.624) 36.652,39.7 v1(42.24,39.7)
"+5V USB": C51.2 C52.2 FB5.1 J4.1 U5.3 | length 36.2
  Top Layer w0.762: U5.3@72.546,39.378 72.518,39.349 72.518,39.047 72.503,39.032 72.503,38.183 72.424,38.104 C52.2@72.424,37.897 72.64,37.68 72.64,36.518 C51.2@72.684,36.474 72.728,36.518 72.728,36.612 75.255,39.138 75.366,39.138 ; FB5.1@73.609,22.537 73.653,22.58 76.791,22.58 78.109,23.898 79.353,23.898 81.795,26.34 81.795,36.296 79.738,38.354 76.151,38.354 75.366,39.138 ; J4.1@75.41,41.097 75.366,41.054 75.366,39.138
EARTH: J2.5 J2.6 J3.S1 J3.S2 R34.2 | length 0.9
  Top Layer w0.254: v1(65.837,2.007) 65.837,2.858 R34.2@65.862,2.883
ETH_RX_N: ?.42 J3.6 R33.2 | length 10.8
  Top Layer w0.152: ?.42@63.455,11.233 63.736,11.233 64.237,10.731 64.457,10.731 64.749,11.024 v1(64.77,11.024) R33.2@65.538,11.024
  Bottom Layer w0.152: v1(64.77,11.024) 64.791,11.024 65.083,10.731 67.501,10.731 68.047,11.278 70.421,11.278 70.51,11.367 70.51,12.192 70.231,12.471 J3.6@69.19,12.471
ETH_RX_P: ?.41 J3.4 R32.2 | length 10.8
  Top Layer w0.152: ?.41@63.455,9.963 63.754,9.963 64.218,10.427 64.457,10.427 64.749,10.135 v1(64.77,10.135) R32.2@65.538,10.135
  Bottom Layer w0.152: v1(64.77,10.135) 64.791,10.135 65.083,10.427 67.627,10.427 68.161,10.96 69.685,10.96 71.73,8.915 J3.4@71.73,8.661
ETH_TX_N: ?.44 J3.3 R31.2 | length 25.8
  Top Layer w0.152: ?.44@63.455,13.773 63.736,13.773 64.234,13.275 64.397,13.275 64.684,13.562 v1(64.71,13.562) 65.512,13.562 R31.2@65.513,13.564
  Bottom Layer w0.152: v1(64.71,13.562) 64.735,13.562 65.023,13.275 65.169,13.275 65.837,13.275 66.267,13.705 70.184,13.705 71.076,12.813 72.276,12.813 73.584,11.505 73.584,5.208 72.44,4.064 71.198,4.064 70.303,4.959 70.303,6.355 69.266,7.391 J3.3@69.19,7.391
ETH_TX_P: ?.43 J3.1 R30.2 | length 25.8
  Top Layer w0.152: ?.43@63.455,12.503 63.751,12.503 64.218,12.97 64.397,12.97 64.684,12.682 v1(64.71,12.682) 65.506,12.682 R30.2@65.513,12.675
  Bottom Layer w0.152: v1(64.71,12.682) 64.735,12.682 65.023,12.97 65.296,12.97 65.963,12.97 66.393,13.4 70.058,13.4 70.95,12.508 72.15,12.508 72.212,12.446 73.279,11.379 73.279,5.334 72.314,4.369 71.324,4.369 70.607,5.085 70.607,7.057 70.942,7.391 71.476,7.391 71.73,7.137 J3.1@71.73,6.121